# Altium PCB SWS_RIGHT.PcbDoc
Units mm, origin at the board's own origin, x right, y up, seen from the top; angles counter-clockwise.
Board outline 46.01 x 38 mm, 2 copper layers (Top Layer, Bottom Layer); 16 components, 0 nets, 74 pads, 0 vias.
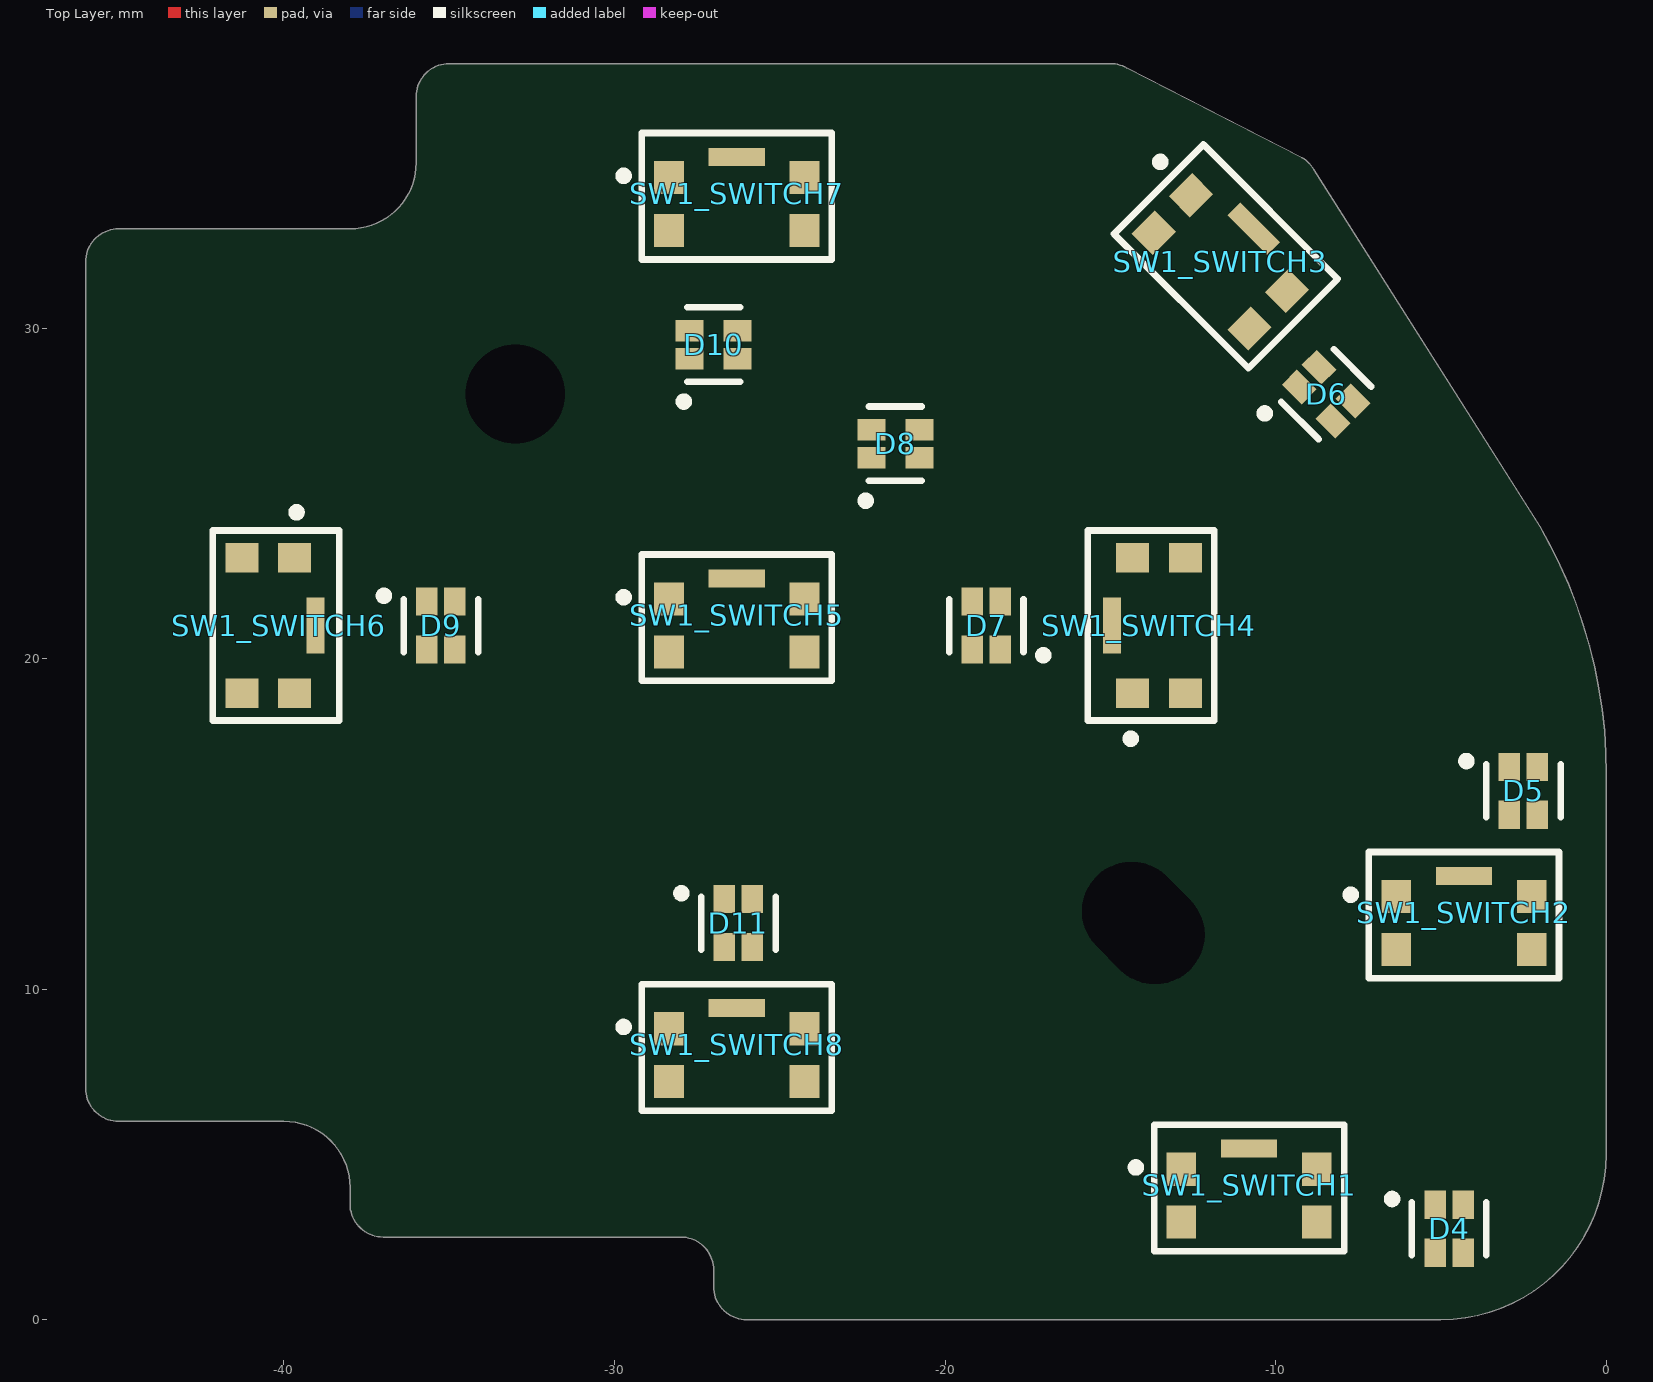
[diagram p0: Top Layer view]
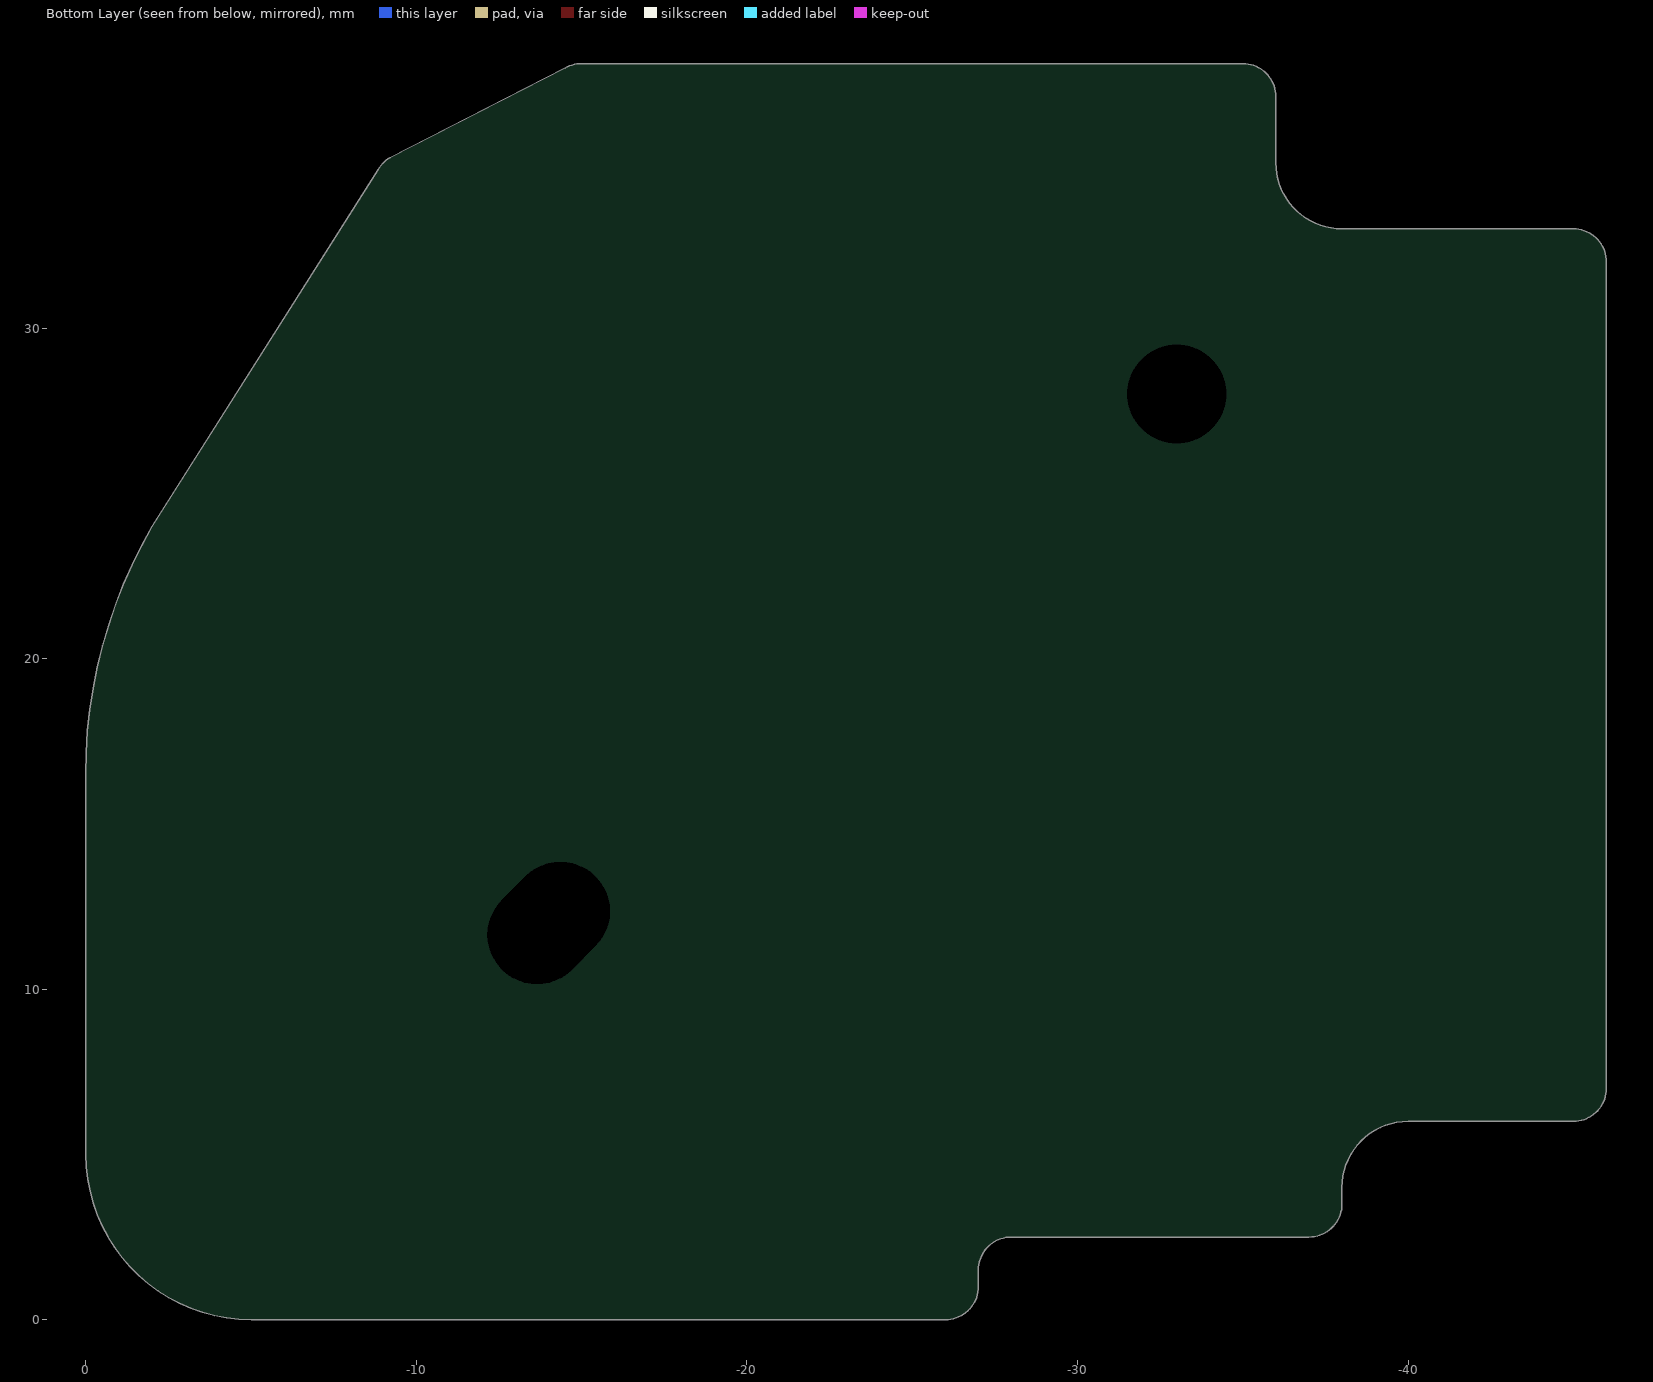
[diagram p1: Bottom Layer view, seen from below]

## Layer stack, top to bottom
Top Solder: solder mask 0.0102, Solder Resist, Dk 3.5
Top Layer: signal copper 0.0356
Dielectric 1: dielectric 0.32, FR-4, Dk 4.8
Bottom Layer: signal copper 0.0356
Bottom Solder: solder mask 0.0102, Solder Resist, Dk 3.5

## Board outline
-38,3.5 -38,4 ccw(c-40,4) -40,6 -45,6 cw(c-45,7) -46,7 -46,32 cw(c-45,32) -45,33 -38,33 ccw(c-38,35) -36,35 -36,37 cw(c-35,37) -35,38 -15,38 cw(c-15,37) -14.5,37.866 -9.207,35.159 cw(c-9.707,34.293) -8.841,34.793 -2,24 cw(c-14.99,16.5) 0.01,16.5 0,16.5 0,5 cw(c-5,5) -5,0 -26,0 cw(c-26,1) -27,1 -27,1.5 ccw(c-28,1.5) -28,2.5 -37,2.5 cw(c-37,3.5)

## Design rules (kind name [scope] priority, off if disabled: settings)
Clearance [All] p1: gap=0.254 ignorepadtopadclearanceinfootprint=FALSE
PolygonConnect [All] p1: connectstyle=Relief reliefconductorwidth=0.254 reliefentries=4 polygonreliefangle="90 Angle" airgapwidth=0.254
RoutingVias [All] p1: holewidth=0.711 width=1.27 viastyle="Through Hole" minholewidth=0.711 minwidth=1.27 maxholewidth=0.711 maxwidth=1.27
SolderMaskExpansion [All] p1: expansion=0.102 istentingtop=FALSE
Width [All] p1: maxlimit=0.254 minlimit=0.254 preferedwidth=0.254
30 further rules are at their usual default settings.

## Components (designator, comment, footprint, x,y, rotation, side; value= is the part's Value field where it differs from the comment)
D4 "LTST-C19HE1WT" FP-LTST-C19HE1WT-MFG -4.75,2.75 r0 top locked
D5 "LTST-C19HE1WT" FP-LTST-C19HE1WT-MFG -2.5,16 r0 top locked
D6 "LTST-C19HE1WT" FP-LTST-C19HE1WT-MFG -8.47,28 r45 top locked
D7 "LTST-C19HE1WT" FP-LTST-C19HE1WT-MFG -18.75,21 r180 top locked
D8 "LTST-C19HE1WT" FP-LTST-C19HE1WT-MFG -21.5,26.5 r90 top locked
D9 "LTST-C19HE1WT" FP-LTST-C19HE1WT-MFG -35.25,21 r0 top
D10 "LTST-C19HE1WT" FP-LTST-C19HE1WT-MFG -27,29.5 r90 top locked
D11 "LTST-C19HE1WT" FP-LTST-C19HE1WT-MFG -26.25,12 r0 top locked
SW1_SWITCH1 "KMR211GLFS" FP-KMR211GLFS-MFG -10.8,3.75 r0 top locked (schematic designator SW1)
SW1_SWITCH2 "KMR211GLFS" FP-KMR211GLFS-MFG -4.3,12 r0 top locked (schematic designator SW1)
SW1_SWITCH3 "KMR211GLFS" FP-KMR211GLFS-MFG -11.67,32 r315 top (schematic designator SW1)
SW1_SWITCH4 "KMR211GLFS" FP-KMR211GLFS-MFG -13.526,21 r90 top locked (schematic designator SW1)
SW1_SWITCH5 "KMR211GLFS" FP-KMR211GLFS-MFG -26.3,21 r0 top locked (schematic designator SW1)
SW1_SWITCH6 "KMR211GLFS" FP-KMR211GLFS-MFG -40.474,21 r270 top locked (schematic designator SW1)
SW1_SWITCH7 "KMR211GLFS" FP-KMR211GLFS-MFG -26.3,33.75 r0 top locked (schematic designator SW1)
SW1_SWITCH8 "KMR211GLFS" FP-KMR211GLFS-MFG -26.3,8 r0 top locked (schematic designator SW1)

## Footprints (in the part's own frame and the unit in brackets; to place one, negate y for a bottom-side part, rotate by r counter-clockwise, add the part's x,y. Pads: shape width x height; smd on the part's side, far side on the other; paste and mask are expansions set on the pad)
FP-KMR211GLFS-MFG [mm]
  rect 0.9x1 smd paste+0 mask+0: 1(-2.05,0.8) 2(2.05,0.8) 3(-2.05,-0.8) 4(2.05,-0.8)
  rect 1.7x0.55 smd paste+0 mask+0: 5(0,1.425)
  silkscreen extent -3.55,-1.68 2.88,2.15
FP-LTST-C19HE1WT-MFG [mm]
  rect 0.65x0.85 smd paste+0 mask+0: 1(-0.425,0.725) 2(0.425,0.725) 3(0.425,-0.725) 4(-0.425,-0.725)
  silkscreen extent -1.85,-0.8 1.12,1.02, body extent -0.8,-0.8 0.8,0.8, height 0.35

## Part data
D4 D5 D6 D7 D8 D9 D10 D11: library part CMP-2000-05201-2, "LED RGB DIFFUSED CHIP SMD", Case Code (Imperial)=0606, Case Code (Metric)=1616, Color=Blue, Forward Current=20mA, Forward Voltage=3.35V, Lens Color=White, Max Operating Temperature=80°C, Min Operating Temperature=-20°C, Package Quantity=3000, Reverse Voltage=5V, Case/Package=0606, Depth=1.6mm, Dominant Wavelength=470nm, Height=0.35mm, Lead Free="Lead Free", Length=1.6mm, Lens Style=Diffused, Lens Transparency=Diffused, Luminous Intensity=180mcd, Mount="Surface Mount", Number of Elements=3, Number of LEDs=3, Number of Pins=4, Packaging="Tape and Reel", Radiation Hardening=No, Test Current=20mA, Viewing Angle=130°, Width=1.6mm
SW1_SWITCH1 SW1_SWITCH2 SW1_SWITCH3 SW1_SWITCH4 SW1_SWITCH5 SW1_SWITCH6 SW1_SWITCH7 SW1_SWITCH8: library part CMP-10040-000023-1, "SWITCH TACTILE SPST-NO 0.05A 32V", Contact Current Rating=50mA, Max Operating Temperature=85°C, Max Voltage Rating (DC)=32V, Min Operating Temperature=-40°C, Operating Force=1.2N, Package Quantity=1, Power Rating=1W, Actuator Length=0.5mm, Actuator Type=Standard, Contact Material=Silver, Contact Plating=Silver, Current Rating=50mA, Depth=4.6mm, Illumination Type=Non-Illuminated, Lead Free="Lead Free", Length=2.8mm, Max Current Rating=50mA, Mechanical Life=200000Cycles, Mount="Surface Mount", Orientation=Straight, Packaging="Tape and Reel", Radiation Hardening=No, REACH SVHC="No SVHC", Switch Function=Off-Mom, Switch Travel=0.2mm, Termination="Gull Wing", Throw Configuration=SPST, Voltage Rating (DC)=32V, Width=2.8mm

## Free pads (board coordinates)
  round 0.5 / inner round 0.5 / far side rrect50% 0.5x0.5 hole 3 slot 4 at 135 deg: 22(-14,12)
  round 0.5 hole 3: 23(-33,28)

## Nets (pads, with @x,y where several pads share a name; then routed paths per layer and width w, separated by ;. In a path a pad name is that pad's centre, name@x,y a point inside that pad or via, vN(x,y) a via of type N, cw(c..) or ccw(c..) an arc to the next point about the centre after c; other vN are vias at no path point)
pads on no net: D4.1 D4.2 D4.3 D4.4 D5.1 D5.2 D5.3 D5.4 D6.1 D6.2 D6.3 D6.4 D7.1 D7.2 D7.3 D7.4 D8.1 D8.2 D8.3 D8.4 D9.1 D9.2 D9.3 D9.4 D10.1 D10.2 D10.3 D10.4 D11.1 D11.2 D11.3 D11.4 SW1_SWITCH1.1 SW1_SWITCH1.2 SW1_SWITCH1.3 SW1_SWITCH1.4 SW1_SWITCH1.5 SW1_SWITCH2.1 SW1_SWITCH2.2 SW1_SWITCH2.3 SW1_SWITCH2.4 SW1_SWITCH2.5 SW1_SWITCH3.1 SW1_SWITCH3.2 SW1_SWITCH3.3 SW1_SWITCH3.4 SW1_SWITCH3.5 SW1_SWITCH4.1 SW1_SWITCH4.2 SW1_SWITCH4.3 SW1_SWITCH4.4 SW1_SWITCH4.5 SW1_SWITCH5.1 SW1_SWITCH5.2 SW1_SWITCH5.3 SW1_SWITCH5.4 SW1_SWITCH5.5 SW1_SWITCH6.1 SW1_SWITCH6.2 SW1_SWITCH6.3 SW1_SWITCH6.4 SW1_SWITCH6.5 SW1_SWITCH7.1 SW1_SWITCH7.2 SW1_SWITCH7.3 SW1_SWITCH7.4 SW1_SWITCH7.5 SW1_SWITCH8.1 SW1_SWITCH8.2 SW1_SWITCH8.3 SW1_SWITCH8.4 SW1_SWITCH8.5

## Other copper
Top Layer:
  text "CHECK SW AND LED POSITION AS WELL AS OUTLINE" at -31.746,41.254 h1.52

## Silkscreen, mask and mechanical layers (free items; w line width, h text height)
Mechanical 1:
  lines w0.254: 0,16.5 0,5 cw(c-5,5) -5,0 -26,0 cw(c-26,1) -27,1 -27,1.5 ccw(c-28,1.5) -28,2.5 -37,2.5 cw(c-37,3.5) -38,3.5 -38,4 ccw(c-40,4) -40,6 -45,6 cw(c-45,7) -46,7 -46,32 cw(c-45,32) -45,33 -38,33 ccw(c-38,35) -36,35 -36,37 cw(c-35,37) -35,38 -15,38 cw(c-15,37) -14.5,37.866 -9.207,35.159 cw(c-9.707,34.293) -8.841,34.793 -2,24 cw(c-14.99,16.5) 0.01,16.5